# EAGLE board  DC mixer v2 PANEL (EAGLE 7.7.0)
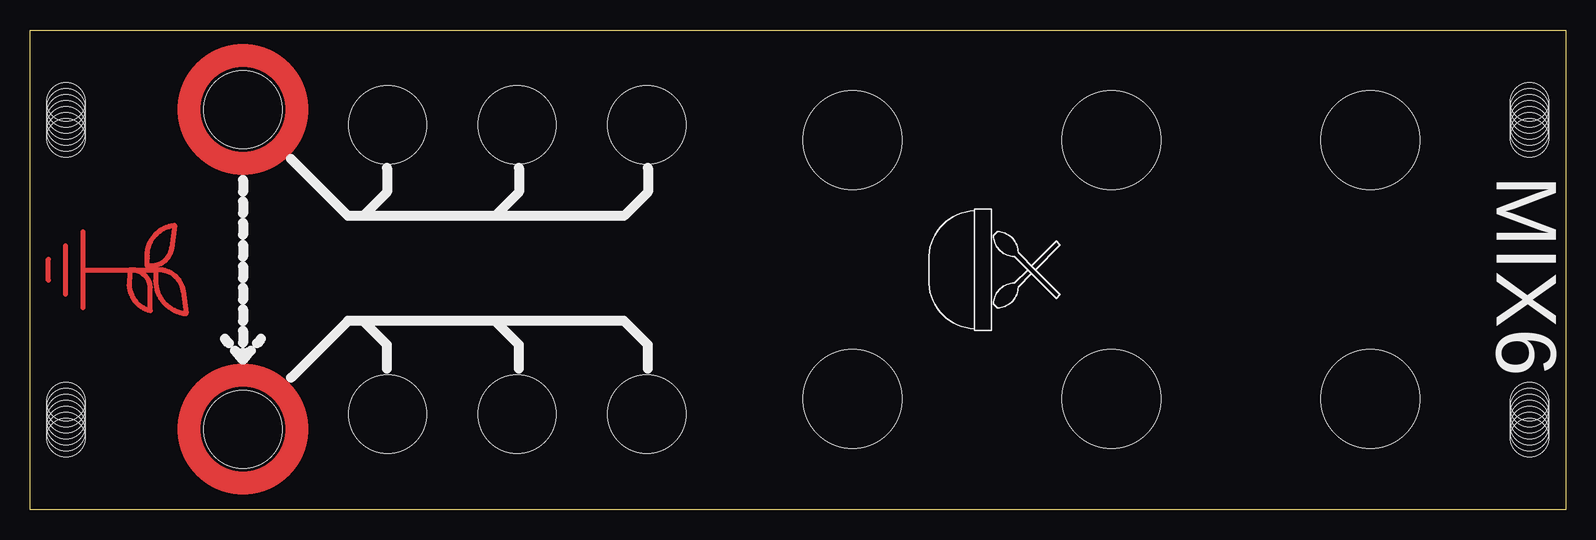
[diagram p0: board, top side]
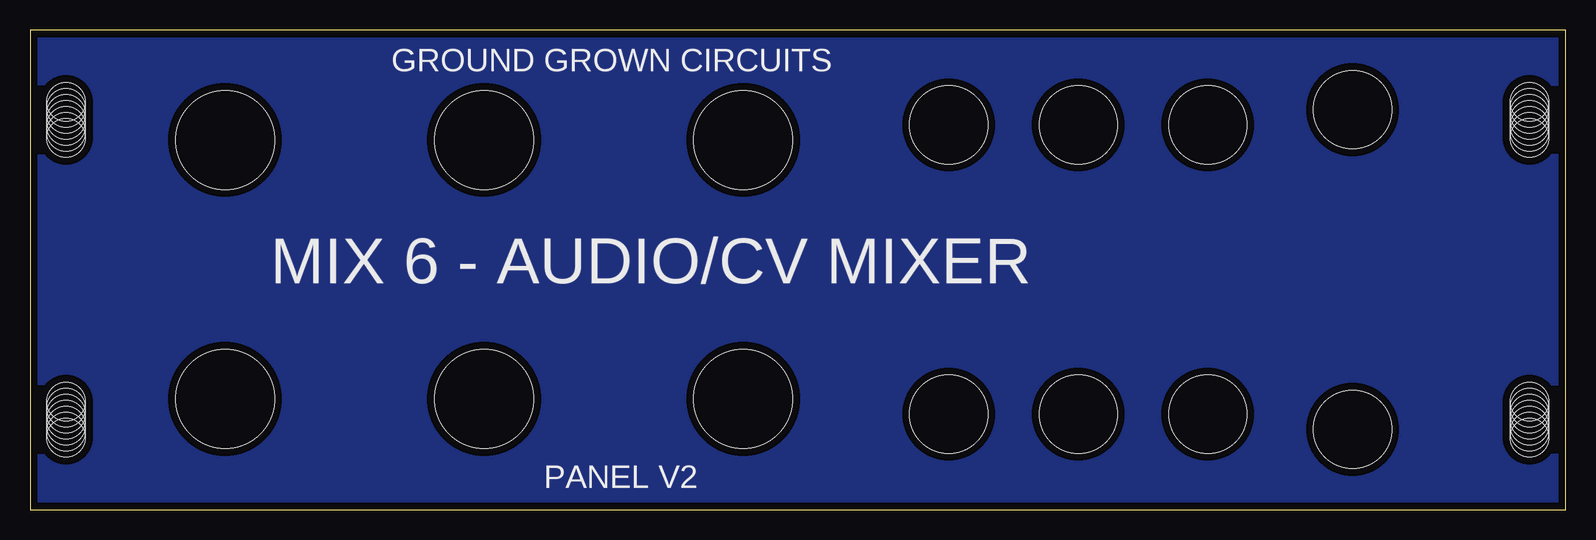
[diagram p1: board, bottom side, seen from below]

Size 128 x 40 mm. Coordinates in mm from the lower left corner, seen from the top.
Outline: 0,0 0,40 128,40 128,0 0,0
Copper layers (1*16): Top 0.035mm / dielectric 1.5mm / Bottom 0.035mm
Design rules "SparkFun": minimum track width 8mil, minimum drill 20mil, track to track 8mil, track to pad 8mil, pad to pad 8mil, via to via 8mil, smd to smd 8mil, copper to edge 8mil, drill to drill 8mil, minimum pad ring 12mil, minimum via ring 10mil, stop-mask expansion 4mil, vias tented up to drill 20mil, thermal gap 10mil

## Footprints (pad centres in the part's own frame; a part is rotated, then mirrored left to right if it is on the bottom)
MOUNT_DRILL = hole 3.2: 3,9; 3,8.5; 3,8; 3,7.5; 3,7; 3,6.5; 3,6
JACK_DRILL = hole 6.5: 0,0
JACK_DRILL_COPPER = hole 6.5: 0,0
POT_DRILL = hole 8.25: 0,0

## Placement (x,y rotation side)
E$1  [MOUNT_DRILL]  128,40 180 top
E$2  [MOUNT_DRILL]  0,0 0 top
E$3  [MOUNT_DRILL]  128,0 0 bottom
E$4  [MOUNT_DRILL]  0,40 180 bottom
E$6  [LOGO_MED_COPPER]  4.5,20 270 top
E$7  [MIXING_BOWL]  80,20 270 top
IN1  [JACK_DRILL]  51.41,32.09 0 top
IN2  [JACK_DRILL]  40.62,32.09 0 top
IN3  [JACK_DRILL]  29.82,32.09 0 top
IN4  [JACK_DRILL]  51.41,7.96 180 top
IN5  [JACK_DRILL]  40.62,7.96 180 top
IN6  [JACK_DRILL]  29.82,7.96 180 top
OUT1  [JACK_DRILL_COPPER]  17.76,33.36 270 top
OUT2  [JACK_DRILL_COPPER]  17.76,6.69 270 top
RV1  [POT_DRILL]  111.74,30.82 180 top
RV2  [POT_DRILL]  90.15,30.82 180 top
RV3  [POT_DRILL]  68.56,30.82 180 top
RV4  [POT_DRILL]  111.74,9.23 180 top
RV5  [POT_DRILL]  90.15,9.23 180 top
RV6  [POT_DRILL]  68.56,9.23 180 top

## Library data of the parts
E$1-E$4 E$6 E$7 IN1-IN6 OUT1 OUT2 = GroundGrownCircuits
RV1-RV6 = GroundGrownCircuits; PROD_ID: RES-09177

## Tracks (layer width: path | path; a pad name or v marks a point on that pad's centre or on a via)
S$1
  pour Bottom (isolate 0.61): 0,0 0,40 128,40 128,0

## Text on the board
tPlace: MIX6
bPlace: GROUND GROWN CIRCUITS | MIX 6 - AUDIO/CV MIXER | PANEL V2